# Altium PCB DRV8801.PcbDoc
Units mm, origin at the board's own origin, x right, y up, seen from the top; angles counter-clockwise.
Board outline 30 x 20 mm, 2 copper layers (Top Layer, Bottom Layer); 12 components, 16 nets, 44 pads, 0 vias.
Unrouted connection lines stored in the file: 28.
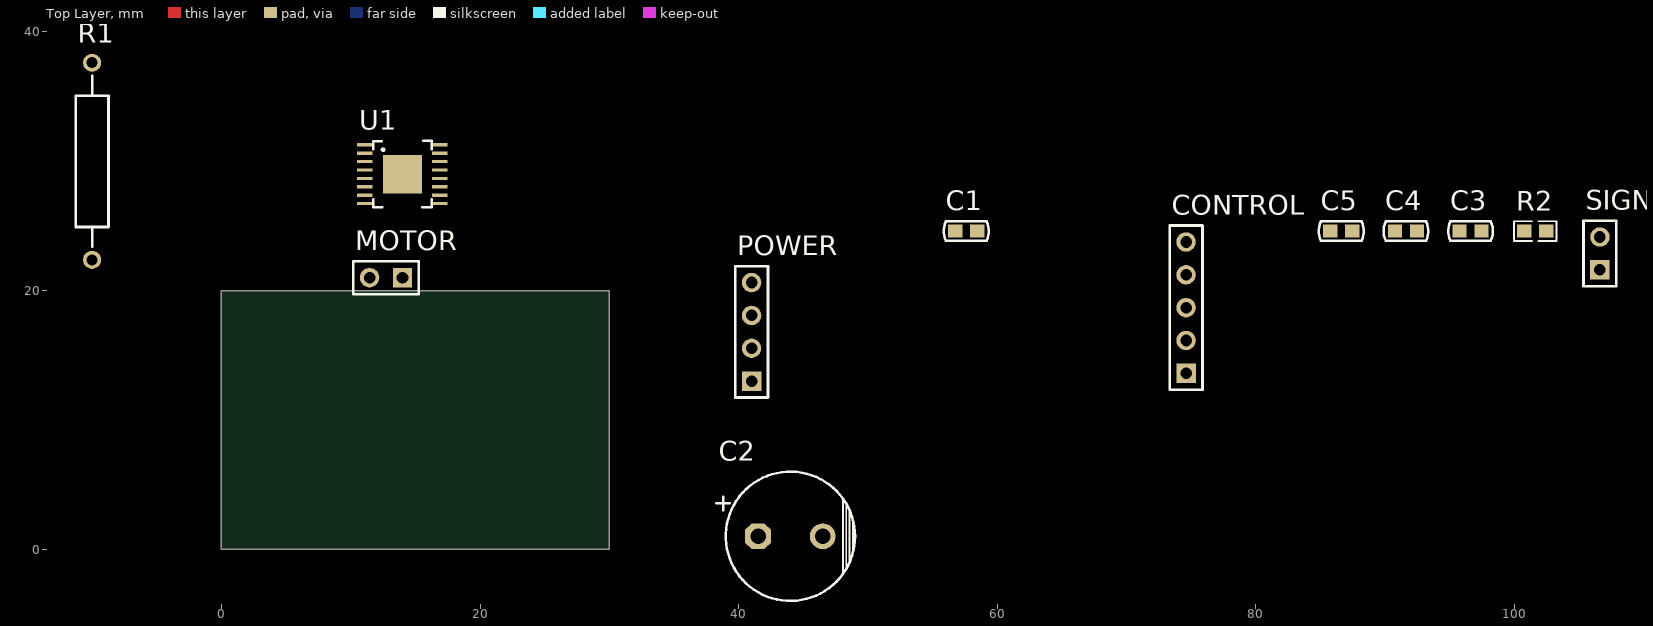
[diagram p0: Top Layer view]
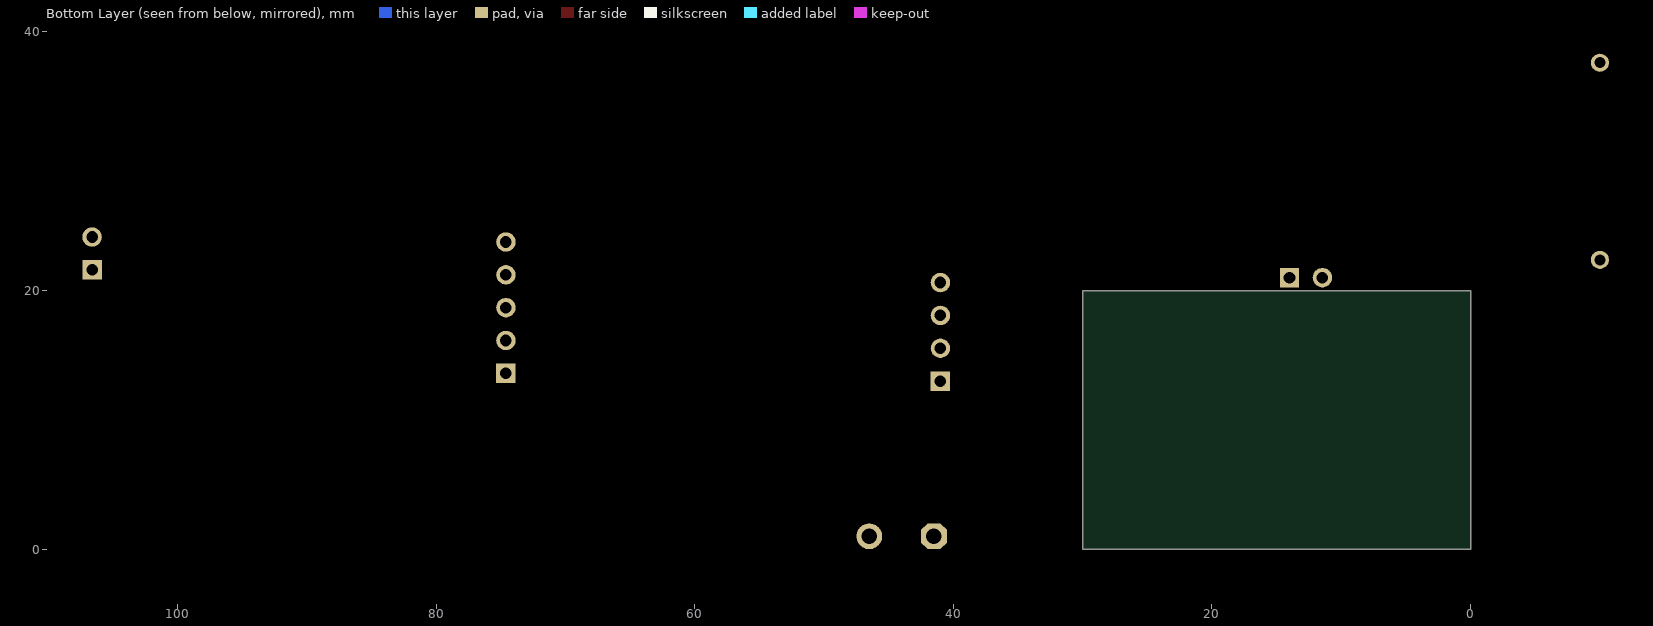
[diagram p1: Bottom Layer view, seen from below]

## Layer stack, top to bottom
Top Solder: solder mask 0.0102, Solder Resist, Dk 3.5
Top Layer: signal copper 0.0356
Dielectric 1: dielectric 0.32, FR-4, Dk 4.8
Bottom Layer: signal copper 0.0356
Bottom Solder: solder mask 0.0102, Solder Resist, Dk 3.5

## Board outline
0,0 0,20 30,20 30,0 0,0

## Design rules (kind name [scope] priority, off if disabled: settings)
Clearance [All] p1: gap=0.254
PolygonConnect [All] p1: connectstyle=Relief reliefconductorwidth=0.254 reliefentries=4 polygonreliefangle="90 Angle" airgapwidth=0.254
RoutingVias [All] p1: holewidth=0.711 width=1.27 viastyle="Through Hole" minholewidth=0.711 minwidth=1.27 maxholewidth=0.711 maxwidth=1.27
SolderMaskExpansion [All] p1: expansion=0.102
Width [All] p1: maxlimit=0.254 minlimit=0.254 preferedwidth=0.254
30 further rules are at their usual default settings.

## Components (designator, comment, footprint, x,y, rotation, side; value= is the part's Value field where it differs from the comment)
C1 "Cap-S" C-0603 57.6,24.6 r0 top
C2 "Cap-Pol-ER" C-RB-5.0/10 44,1 r0 top
C3 "Cap-S" C-0603 96.6,24.6 r0 top
C4 "Cap-S" C-0603 91.6,24.6 r0 top
C5 "Cap-S" C-0603 86.6,24.6 r0 top
CONTROL "Header 5" HDR1X5 74.6,13.6 r90 top
MOTOR "Header 2" HDR2X1-2.54 14,21 r180 top
POWER "Header 4" HDR1X4 41,13 r90 top
R1 "Res Adj2" AXIAL-0.6 -10,30 r270 top
R2 "Res1" 0603-1 101.6,24.6 r0 top
SIGNAL "Header 2" HDR1X2 106.6,21.6 r90 top
U1 "DRV8801" HTSSOP16 14,29 r0 top

## Footprints (in the part's own frame and the unit in brackets; to place one, negate y for a bottom-side part, rotate by r counter-clockwise, add the part's x,y. Pads: shape width x height; smd on the part's side, far side on the other; paste and mask are expansions set on the pad)
0603-1 [mm] "0603带丝印"
  rect 1.1x1 smd: 1(-0.85,0) 2(0.85,0)
  silkscreen extent -1.65,-0.76 1.65,0.76, body extent -0.8,-0.4 0.8,0.4, height 0.3
AXIAL-0.6 [mm] "Axial Device, Thru-Hole; 2 Leads; 0.6 in Pin Spacing"
  round 1.4 hole 0.85: 1(-7.62,0) 2(7.62,0)
  silkscreen extent -6.6,-1.27 6.6,1.27
C-0603 [mm] "贴片电容"
  rect 1.1x1 smd: 1(-0.85,0) 2(0.85,0)
  silkscreen extent -1.73,-0.76 1.73,0.76, body extent -0.8,-0.4 0.8,0.4, height 0.3
C-RB-5.0/10 [mm] "插件电解电容"
  oct 2x2 hole 1.2: 1(-2.5,0)
  round 2 hole 1.2: 2(2.5,0)
  silkscreen extent -5.71,-5 5,5
HDR1X2 [mm] "Connector; Header; 2 Position"
  rect 1.5x1.5 hole 0.9: 1(0,0)
  round 1.5 hole 0.9: 2(2.54,0)
  silkscreen extent -1.27,-1.27 3.81,1.27
HDR1X4 [mm] "Connector; Header; 4 Position"
  rect 1.5x1.5 hole 0.9: 1(0,0)
  round 1.5 hole 0.9: 2(2.54,0) 3(5.08,0) 4(7.62,0)
  silkscreen extent -1.27,-1.27 8.89,1.27
HDR1X5 [mm] "Connector; Header; 5 Position"
  rect 1.5x1.5 hole 0.9: 1(0,0)
  round 1.5 hole 0.9: 2(2.54,0) 3(5.08,0) 4(7.62,0) 5(10.16,0)
  silkscreen extent -1.27,-1.27 11.43,1.27
HDR2X1-2.54 [mm] "2.54单排针排座"
  rect 1.5x1.5 hole 0.9: 1(0,0)
  round 1.5 hole 0.9: 2(2.54,0)
  silkscreen extent -1.27,-1.27 3.81,1.27, body extent -1.27,-1.27 3.81,1.27, height 8.54
HTSSOP16 [mm]
  rect 3x3 smd paste+0 mask+0.1: 0(0,0)
  rect 1.2x0.25 smd paste+0 mask+0.1: 1(-2.9,2.275) 2(-2.9,1.625) 3(-2.9,0.975) 4(-2.9,0.325) 5(-2.9,-0.325) 6(-2.9,-0.975) 7(-2.9,-1.625) 8(-2.9,-2.275) 9(2.9,-2.275) 10(2.9,-1.625) 11(2.9,-0.975) 12(2.9,-0.325) 13(2.9,0.325) 14(2.9,0.975) 15(2.9,1.625) 16(2.9,2.275)
  silkscreen extent -2.25,-2.55 2.25,2.58

## Part data
C1 C3 C4 C5: "贴片瓷片电容"
C2: "插件电解电容"
CONTROL: "Header, 5-Pin"
MOTOR: "接插件"
POWER: "Header, 4-Pin"
R1: "Variable Resistor"
R2: "贴片电阻"
SIGNAL: "Header, 2-Pin"

## Nets (pads, with @x,y where several pads share a name; then routed paths per layer and width w, separated by ;. In a path a pad name is that pad's centre, name@x,y a point inside that pad or via, vN(x,y) a via of type N, cw(c..) or ccw(c..) an arc to the next point about the centre after c; other vN are vias at no path point)
ENABLE: SIGNAL.1 U1.6
GND: C1.1 C2.2 C5.1 POWER.1 POWER.2 R1.1 U1.0 U1.4 U1.13
MODE1: CONTROL.4 U1.2
MODE2: CONTROL.3 U1.16
NetC3_2: C3.2 U1.14
NetC4_1: C4.1 U1.11
NetC4_2: C4.2 U1.12
NetMOTOR_1: MOTOR.1 U1.10
NetMOTOR_2: MOTOR.2 U1.7
NetR1_2: R1.2 U1.8
NetR2_1: R2.1 U1.15
NFAULT: CONTROL.5 U1.1
NSLEEP: CONTROL.2 U1.5
PHASE: SIGNAL.2 U1.3
VCC_11V: C1.2 C2.1 C3.1 POWER.3 POWER.4 U1.9
VPROPI: C5.2 CONTROL.1 R2.2